# Allegro board P1_STAB_TENS.brd
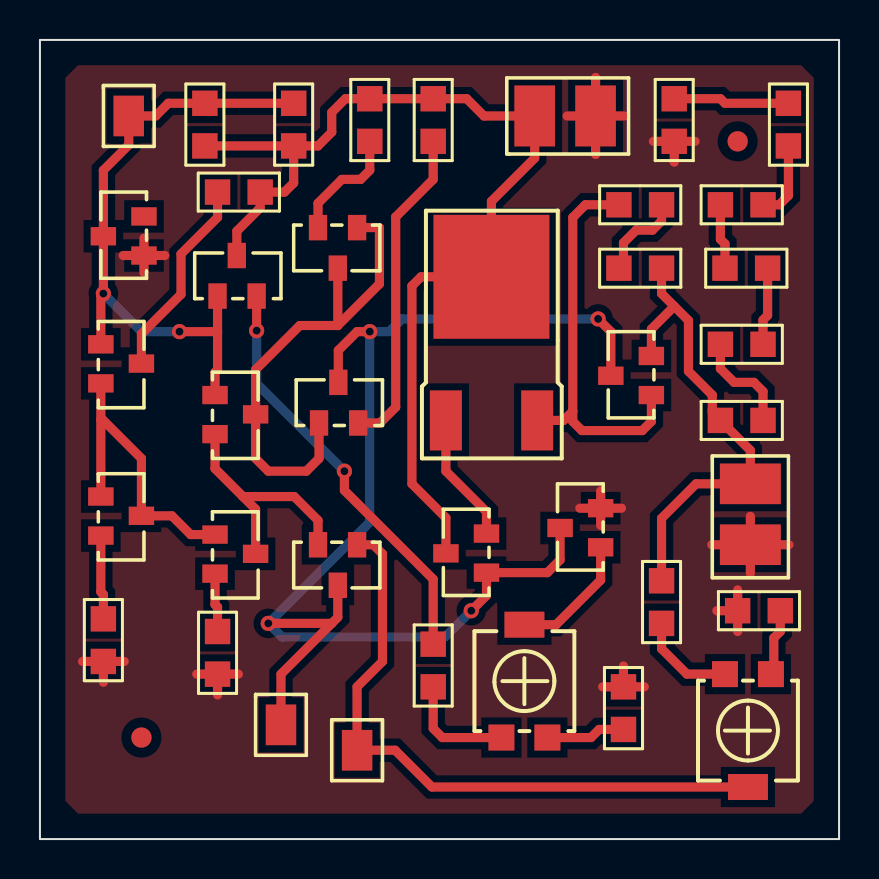
[diagram p0: board, top side]
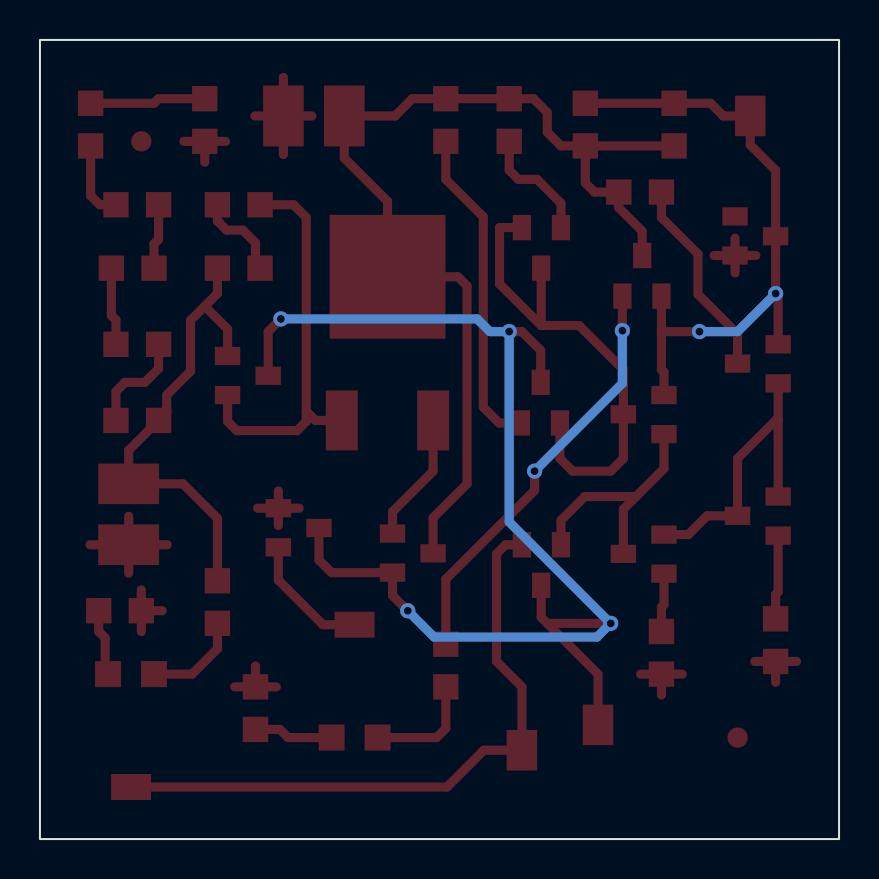
[diagram p1: board, bottom side, seen from below]

Outline 40 x 40 mm; copper layers: TOP, BOTTOM. Coordinates in mm from the lower left corner of the outline.
Outline path: rectangle 0,0 40,40

## Placement (name value [footprint] x y rotation side)
D1  BZX84-C5V6  [TO236]  5.08 29.21 0 top
DIFFOUT  CON1  [JUMPER1]  12.06 5.71 0 top
FB  CON1  [JUMPER1]  15.88 4.45 0 top
NOREF  -  []  0 0 90 top
NOREF#2  -  []  0 40 0 top
NOREF#3  -  [unnamed#2]  34.92 34.92 0 top
NOREF#4  -  [unnamed#2]  5.08 5.08 0 top
NOREF#5  -  []  40 0 90 top
NOREF#6  -  []  0 0 0 top
OUT  CON2  [JUMPER2]  35.56 17.78 270 top
P  100  [TS53YL]  25.4 5.08 270 top
POUT  5k  [TS53YL]  34.29 8.26 90 top
Q1  QBC846B  [TO236]  3.17 24.77 180 top
Q2  QBC846B  [TO236]  3.17 17.14 180 top
Q3  QBC846B  [TO236]  8.89 15.24 180 top
Q4  QBC846B  [TO236]  8.89 22.23 180 top
Q5  QBC846B  [TO236]  15.88 14.61 90 top
Q6  QBC856B  [TO236]  15.88 30.48 90 top
Q7  QBC856B  [TO236]  13.97 20.95 270 top
Q8  QBC846B  [TO236]  22.23 13.34 0 top
Q9  QMJD31C  [DPACK]  20.32 20.95 0 top
Q10  QBC846B  [TO236]  30.48 22.23 0 top
Q11  QBC846B  [TO236]  8.89 27.3 270 top
Q12  QBC846B  [TO236]  27.94 14.61 0 top
R1  3k3  [SMR0805]  8.89 32.38 0 top
R2  1k  [SMR0805]  3.17 8.89 90 top
R3  1k  [SMR0805]  8.89 8.26 90 top
R4  220  [SMR0805]  16.51 34.92 90 top
R5  220  [SMR0805]  19.68 34.92 90 top
R6  1k  [SMR0805]  19.68 7.62 90 top
R7  51  [SMR0805]  29.21 7.62 270 top
R8  1k  [SMR0805]  31.11 10.79 90 top
R9  3k3  [SMR0805]  34.92 11.43 0 top
R11  1  [SMR0805]  31.11 31.75 180 top
R12  1  [SMR0805]  31.11 28.57 180 top
RL1  150  [SMR0805]  36.2 20.95 180 top
RL2  150  [SMR0805]  36.2 24.77 180 top
RL3  150  [SMR0805]  34.29 28.57 0 top
RL4  100  [SMR0805]  36.2 31.75 180 top
RL5  100  [SMR0805]  37.47 36.83 270 top
RL6  100  [SMR0805]  31.75 34.92 90 top
RZ  5k6  [SMR0805]  12.7 36.83 270 top
RZ1  5k6  [SMR0805]  8.26 36.83 270 top
VCC  CON2  [JUMPER2]  24.77 36.2 0 top
ZENER  CON1  [JUMPER1]  4.45 36.2 0 top

## Library data of the parts
D1 = BZX84-C5V6_5
DIFFOUT FB ZENER = CON1: User Part Number: ***
OUT VCC = CON2: User Part Number: ***
P POUT = POT
Q1-Q5 Q11 Q12 = QBC846B_1
Q6 Q7 = QBC856B_1
Q8 = QBC846B_2
Q9 = QMJD31C_2
Q10 = QBC846B_3
R1-R9 R11 R12 RL1-RL6 RZ RZ1 = R

## Footprints (pads in the part's own frame, mm; a bottom-side part is the same pattern mirrored in y, then rotated)
DPACK
  rect 1.6x3 smd: 1(0,0) 3(4.57,0)
  rect 5.8x6.2 smd: 2(2.28,7.19)
JUMPER1
  rect 1.524x2.032 smd: 1(0,0)
JUMPER2
  rect 2.032x3.048 smd: 1(0,0) 2(3.048,0)
SMR0805
  rect 1.27x1.27 smd: 1(0,0) 2(2.134,0)
TO236
  rect 1.27x0.914 smd: 1(0.127,0) 2(0.127,1.956) 3(-1.905,0.965)
TS53YL
  rect 1.3x1.3 smd: 1(0,0) 3(0,-2.3)
  rect 1.3x2 smd: 2(-5.65,-1.15)
unnamed#2
  round 1.016 smd: (0,0)

## Nets
0: D1.1 OUT.2 Q12.2 R2.1 R3.1 R7.1 R9.1 RL6.1 VCC.2
IN: Q8.3 Q9.2 Q11.3 R1.2 R4.2 R5.2 RZ.2 RZ1.2 VCC.1
OUT: OUT.1 Q10.2 R8.2 R12.1 RL1.2
VREF: D1.3 Q1.1 Q4.1 Q11.1 RZ.1 RZ1.1 ZENER.1
N00168: Q3.3 Q4.2 Q5.2
N00192: Q1.2 Q2.1 Q2.3 Q3.1
N00393: Q2.2 R2.2
N00397: Q3.2 R3.2
N00401: Q4.3 Q6.1 Q6.3 Q7.1
N00405: Q6.2 R4.1
N00423: DIFFOUT.1 Q5.3 Q7.3 Q8.1 Q10.3 Q12.3
N00427: Q7.2 R5.1
N00489: Q1.3 R1.1
N00640: Q8.2 Q9.1
N01001: POUT.1 R8.1
N01005: POUT.3(2) R9.2
N01027: FB.1 POUT.2(T) Q5.1
N01311: Q9.3 Q10.1 R11.2
N01315: R11.1 R12.2
N02988: RL1.1 RL2.2
N02992: RL2.1 RL3.2
N02996: RL3.1 RL4.2
N03000: RL4.1 RL5.2
N03109: RL5.1 RL6.2
N05202: P.3(2) R6.1
N05206: P.1 R7.2
N05678: P.2(T) Q12.1
N049661: Q11.2 R6.2

Pads without a net: D1 2

## Via types
v1: diameter 0.762, hole 0.4, TOP to BOTTOM, 8 vias

## Routing (per net, layer and track width the routed paths; a pad name or vN(x,y) marks a point on that pad's centre or on a via; arc(x,y) is an arc through that point)
0: length 36.7
  TOP w0.457: R7.1 29.21,8.66 ; R7.1 30.25,7.62 ; R7.1 28.17,7.62 ; D1.1 6.25,29.21 ; D1.1 4.17,29.21 ; D1.1 5.21,30.07 ; D1.1 5.21,28.35 ; 26.39,36.2 27.81,36.2 ; 27.81,36.2 27.81,34.26 ; 27.81,36.2 29.24,36.2 ; 27.81,36.2 27.81,38.13 ; 28.07,15.7 Q12.2 ; Q12.2 27.03,16.56 ; Q12.2 29.11,16.56 ; Q12.2 28.07,17.42 ; 33.88,11.43 R9.1 ; R9.1 34.92,10.39 ; R9.1 34.92,12.47 ; 2.13,8.89 R2.1 ; R2.1 3.17,7.85 ; R2.1 4.22,8.89 ; OUT.2 37.49,14.73 ; OUT.2 35.56,13.31 ; OUT.2 35.56,16.15 ; OUT.2 33.63,14.73 ; 7.85,8.26 R3.1 ; R3.1 9.93,8.26 ; R3.1 8.89,7.21 ; 30.71,34.92 RL6.1 ; RL6.1 32.79,34.92 ; RL6.1 31.75,33.88
IN: length 53
  TOP w0.457: RZ1.2 RZ.2 ; RZ.2 13.92,34.7 14.61,35.38 14.61,36.37 15.29,37.06 R4.2 R5.2 21.36,37.06 22.23,36.2 VCC.1 24.77,34.09 22.6,31.92 Q9.2 19.08,28.14 18.62,27.69 18.62,17.78 20.32,16.08 Q8.3 ; RZ.2 12.7,32.84 12.24,32.38 R1.2 11.02,31.6 9.86,30.43 Q11.3
OUT: length 23.9
  TOP w0.457: 31.75,26.67 30.61,25.53 Q10.2 ; 31.75,26.67 31.11,27.3 R12.1 ; 31.75,26.67 32.46,25.96 32.46,23.42 33.66,22.23 33.66,21.36 RL1.2 35.56,19.46 OUT.1 32.84,17.78 31.11,16.05 R8.2
VREF: length 32.2
  TOP w0.457: 8.89,25.4 Q11.1 ; 8.89,25.4 8.89,23.5 8.76,23.37 Q4.1 ; 8.89,25.4 v1(6.99,25.4) ; 3.17,27.43 v1(3.17,27.3) ; 3.17,27.43 D1.3 3.17,33.48 4.45,34.75 ZENER.1 5.79,36.2 6.43,36.83 RZ1.1 RZ.1 ; 3.17,27.43 3.05,27.3 Q1.1
  BOTTOM w0.457: v1(3.17,27.3) 5.08,25.4 v1(6.99,25.4)
N00168: length 12.3
  TOP w0.457: Q5.2 13.92,15.95 12.73,17.14 10.16,17.14 ; 10.16,17.14 8.76,18.54 Q4.2 ; 10.16,17.14 10.79,16.51 Q3.3
N00192: length 15.4
  TOP w0.457: Q3.1 7.54,15.24 6.6,16.18 Q2.3 5.08,19.05 3.13,21 3.05,21 ; 3.05,21 Q2.1 ; 3.05,21 Q1.2
N00393: length 4.2
  TOP w0.457: Q2.2 3.05,12.37 3.17,12.24 R2.2
N00397: length 2.9
  TOP w0.457: Q3.2 8.76,11.73 8.89,11.61 R3.2
N00401: length 24.7
  TOP w0.457: Q6.3 14.91,25.7 ; 14.91,25.7 13,25.7 10.79,23.5 Q4.3 10.79,19.05 11.43,18.41 13.34,18.41 13.97,19.05 Q7.1 ; 14.91,25.7 16.99,27.79 16.99,30.59 16.97,30.61 Q6.1
N00405: length 5.9
  TOP w0.457: Q6.2 13.92,31.83 15.11,33.02 16.05,33.02 16.51,33.48 R4.1
N00423: length 65.2
  TOP w0.457: v1(21.59,11.43) 22.35,12.19 Q8.1 25.4,13.34 26.04,13.97 Q12.3 ; v1(11.43,10.79) 14.61,10.79 ; 14.61,10.79 14.91,11.1 Q5.3 ; 14.61,10.79 12.06,8.26 DIFFOUT.1 ; v1(27.94,26.04) 28.57,25.4 Q10.3 ; v1(16.51,25.4) 15.88,25.4 14.94,24.46 Q7.3
  BOTTOM w0.457: v1(21.59,11.43) 20.27,10.11 12.11,10.11 v1(11.43,10.79) 16.51,15.88 v1(16.51,25.4) 17.48,25.4 18.11,26.04 v1(27.94,26.04)
N00427: length 16.3
  TOP w0.457: Q7.2 17.02,20.83 17.81,21.62 17.81,31.14 19.68,33.02 R5.1
N00489: length 10.2
  TOP w0.457: R1.1 8.89,31.11 7.06,29.29 7.06,27.27 5.08,25.29 Q1.3
N00640: length 6.5
  TOP w0.457: Q8.2 22.35,16.38 20.32,18.41 Q9.1
N01001: length 5
  TOP w0.457: R8.1 31.11,9.53 32.38,8.26 POUT.1
N01005: length 3.4
  TOP w0.457: POUT.3 36.74,8.4 36.74,10.07 37.06,10.39 R9.2
N01027: length 32.1
  TOP w0.457: Q5.1 16.69,14.73 17.14,14.27 17.14,8.89 15.88,7.62 FB.1 17.78,4.45 19.62,2.61 POUT.2
N01311: length 20.4
  TOP w0.457: 26.67,21.41 26.21,20.95 Q9.3 ; 26.67,21.41 26.67,31.11 27.3,31.75 R11.2 ; 26.67,21.41 26.67,20.9 27.13,20.45 30.15,20.45 30.61,20.9 Q10.1
N01315: length 4.5
  TOP w0.457: R11.1 31.11,30.94 30.66,30.48 29.84,30.48 29.21,29.84 29.21,28.8 R12.2
N02988: length 5.3
  TOP w0.457: RL2.2 34.06,23.55 34.75,22.86 35.74,22.86 36.2,22.4 RL1.1
N02992: length 3.9
  TOP w0.457: RL3.2 36.42,26.21 36.2,25.98 RL2.1
N02996: length 3.3
  TOP w0.457: RL3.1 34.29,29.79 34.06,30.02 RL4.2
N03000: length 3.9
  TOP w0.457: RL5.2 37.47,32.21 37.01,31.75 RL4.1
N03109: length 5.8
  TOP w0.457: RL5.1 34.29,36.83 34.06,37.06 RL6.2
N05202: length 5.7
  TOP w0.457: R6.1 19.68,5.54 20.14,5.08 P.3
N05206: length 4
  TOP w0.457: R7.2 27.99,5.49 27.58,5.08 P.1
N05678: length 6.4
  TOP w0.457: Q12.1 28.07,12.96 25.83,10.73 P.2
N049661: length 21.1
  TOP w0.457: Q11.2 v1(10.85,25.45) ; R6.2 19.68,13 15.24,17.45 v1(15.24,18.41)
  BOTTOM w0.457: v1(10.85,25.45) 10.85,22.81 v1(15.24,18.41)

## Copper pours and planes (outline as drawn; the poured copper is in the pictures)
0 on TOP: 1.27,38.1 1.91,38.73 38.1,38.73 38.73,38.1 38.73,1.91 38.1,1.27 1.91,1.27 1.27,1.91 ; 15 cut-outs

## Text on the board
XSECTION_CHART: *  SURFACE - AIR 0 MIL | L1: TOP CONDUCTOR - COPPER 0.71 MIL | *  DIELECTRIC - FR-4 61.57 MIL | L2: BOTTOM CONDUCTOR - COPPER 0.71 MIL | DESIGN CROSS SECTION CHART | ___________________________ | TOTAL THICKNESS 62.99 MIL | 1-2 | FIGURE | SIZE | 15.74 | DRILL CHART: TOP to BOTTOM | ALL UNITS ARE IN MILS | PLATED | QTY | 16
